# EAGLE board BusPirate-Panel-v3.6a (EAGLE 7.5.0), part 1 of 4
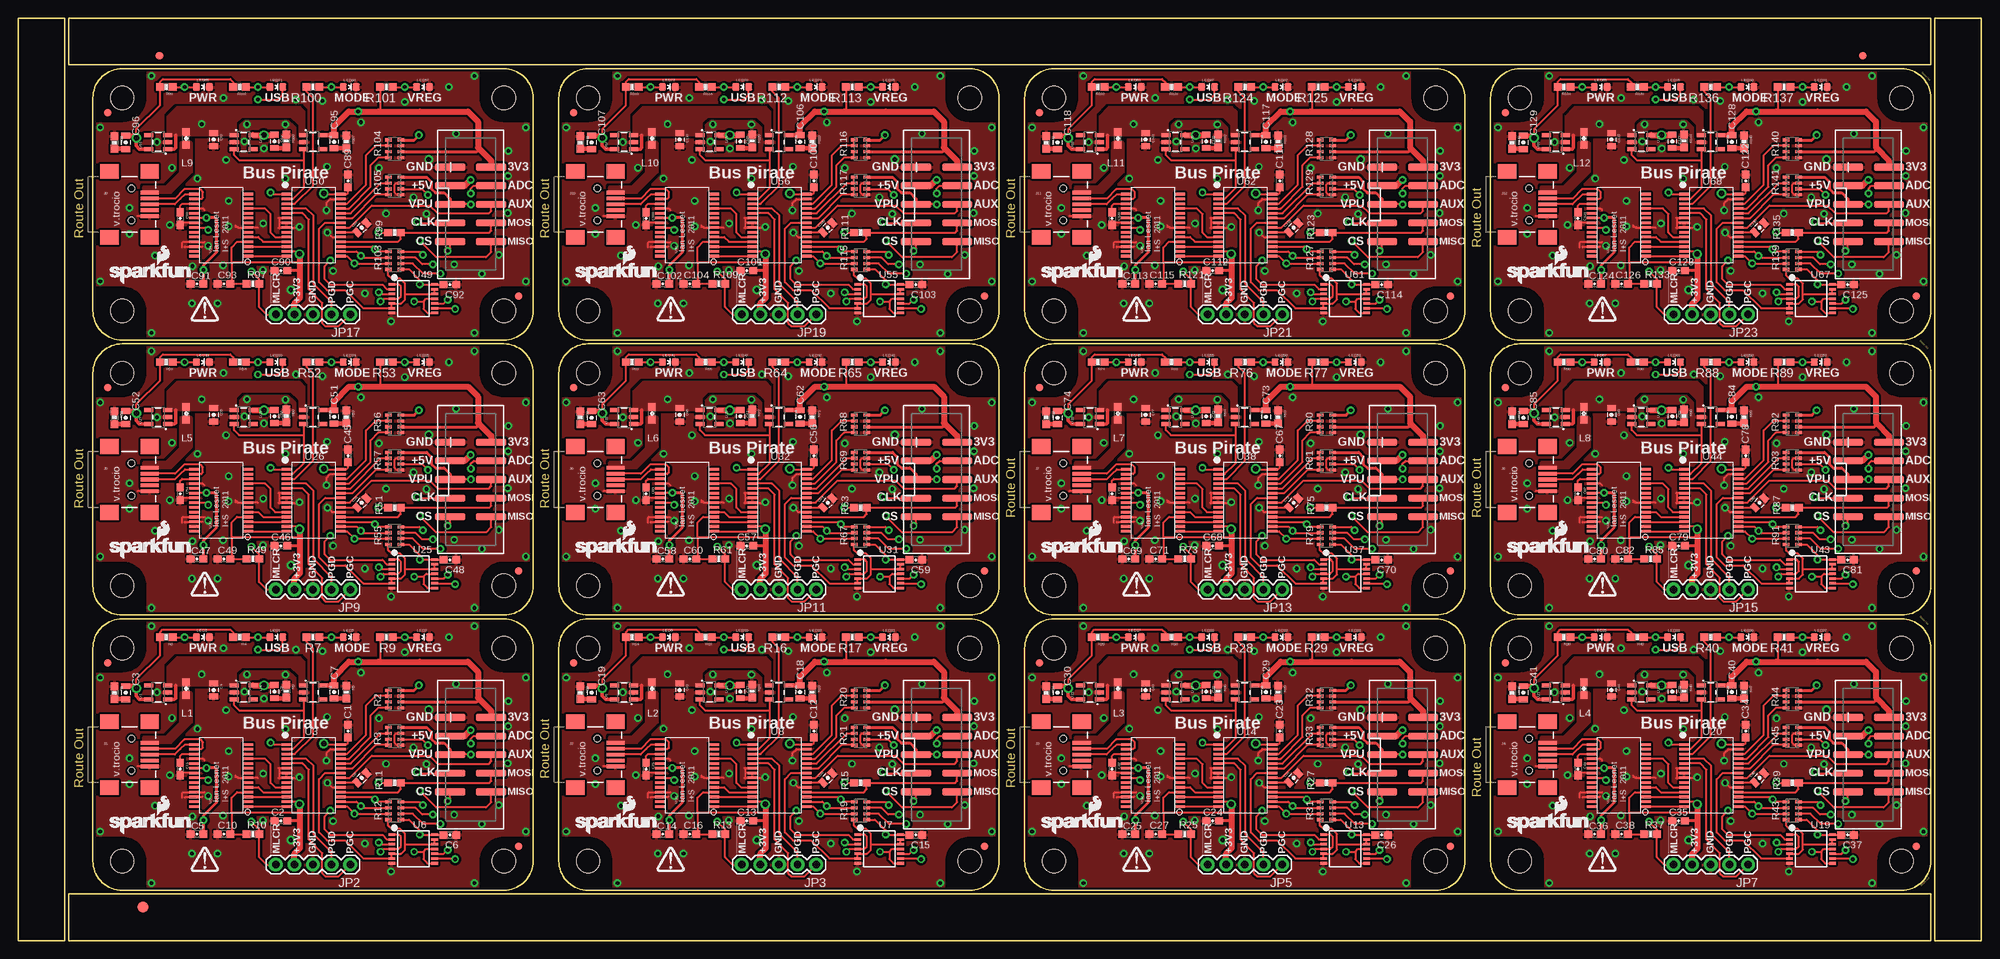
[diagram p0: board, top side]
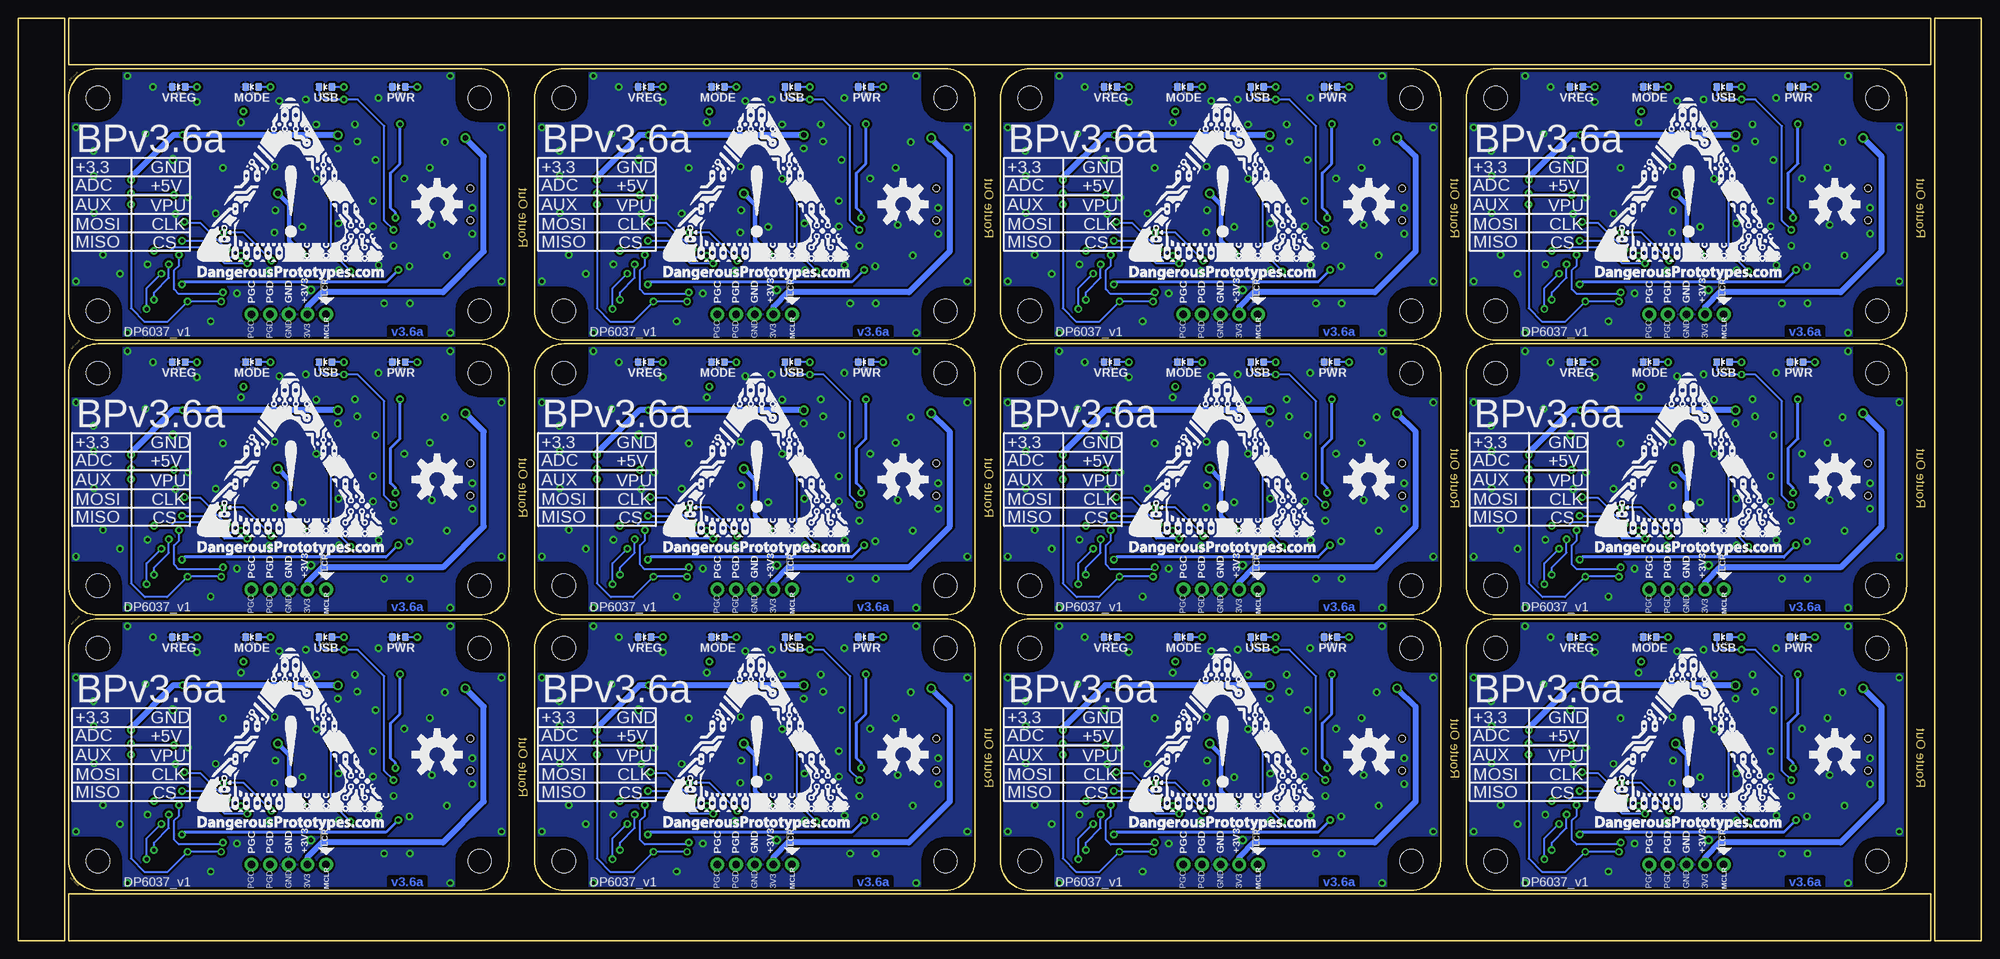
[diagram p1: board, bottom side, seen from below]

Size 267.52 x 125.73 mm. Coordinates in mm from the lower left corner, seen from the top.
Outline: 6.35,79.25 6.35,0 0,0 0,29.72
Outline: 0,27.18 0,125.73 6.35,125.73 6.35,76.71
Outline: 82.55,0 6.86,0 6.86,6.35 33.02,6.35
Outline: 30.48,6.35 260.66,6.35 260.66,0 80.01,0
Outline: 161.55,125.73 260.66,125.73 260.66,119.38 211.08,119.38
Outline: 213.62,119.38 6.86,119.38 6.86,125.73 164.09,125.73
Outline: 267.52,80.52 267.52,0 261.17,0 261.17,30.99
Outline: 261.17,28.45 261.17,125.73 267.52,125.73 267.52,77.98
Copper layers (1*16): Top 0.035mm / dielectric 1.5mm / Bottom 0.035mm
Design rules "SparkFun-2-layer *": minimum track width 7mil, minimum drill 15mil, track to track 8mil, track to pad 8mil, pad to pad 8mil, via to via 8mil, smd to smd 8mil, copper to edge 8mil, drill to drill 8mil, minimum pad ring 12mil, minimum via ring 10mil, stop-mask expansion 4mil, vias tented up to drill 30mil, thermal gap 10mil
tKeepout: 96 lines
bKeepout: 96 lines
tRestrict: area 10.2,36.9 to 17.2,43.9; area 63.2,36.9 to 70.2,43.9; area 10.2,6.9 to 17.2,13.9; area 63.2,6.9 to 70.2,13.9; area 36.3,23.1 to 36.9,23.3; area 23.7,19.8 to 24.2,20; area 73.7,36.9 to 80.7,43.9; area 126.7,36.9 to 133.7,43.9; area 73.7,6.9 to 80.7,13.9; area 126.7,6.9 to 133.7,13.9; area 99.8,23.1 to 100.4,23.3; area 87.2,19.8 to 87.7,20; 60 more areas
bRestrict: area 10.2,36.9 to 17.2,43.9; area 63.2,36.9 to 70.2,43.9; area 10.2,6.9 to 17.2,13.9; area 63.2,6.9 to 70.2,13.9; area 73.7,36.9 to 80.7,43.9; area 126.7,36.9 to 133.7,43.9; area 73.7,6.9 to 80.7,13.9; area 126.7,6.9 to 133.7,13.9; area 137.2,36.9 to 144.2,43.9; area 190.2,36.9 to 197.2,43.9; area 137.2,6.9 to 144.2,13.9; area 190.2,6.9 to 197.2,13.9; 36 more areas
vRestrict: area 10.2,36.9 to 17.2,43.9; area 63.2,36.9 to 70.2,43.9; area 10.2,6.9 to 17.2,13.9; area 63.2,6.9 to 70.2,13.9; area 73.7,36.9 to 80.7,43.9; area 126.7,36.9 to 133.7,43.9; area 73.7,6.9 to 80.7,13.9; area 126.7,6.9 to 133.7,13.9; area 137.2,36.9 to 144.2,43.9; area 190.2,36.9 to 197.2,43.9; area 137.2,6.9 to 144.2,13.9; area 190.2,6.9 to 197.2,13.9; 36 more areas

## Footprints (pad centres in the part's own frame; a part is rotated, then mirrored left to right if it is on the bottom)
0603-CAP = smd 1.1 x 1: 1 -0.85,0; 2 0.85,0
0805-CAP = smd 0.8 x 1.2: 1 -0.9,0; 2 0.9,0
FIDUCIAL-1.5X3 = smd 1.5 x 1.5: 1 0,0
FIDUCIAL-1X2 = smd 1 x 1: 1 0,0
USB-MINIB = smd 2.5 x 0.5: D+ 2.5,0; D- 2.5,0.8; GND 2.5,-1.6; ID 2.5,-0.8; VBUS 2.5,1.6 | smd 2.5 x 2: MTN1 -3,4.5; MTN2 2.5,4.5; MTN3 -3,-4.5; MTN4 2.5,-4.5 | hole 0.9: 0,2.2; 0,-2.2
2X5-SHROUDED_SMD = smd 4.15 x 1: 1 -2.794,5.08; 2 2.794,5.08; 3 -2.794,2.54; 4 2.794,2.54; 5 -2.794,0; 6 2.794,0; 7 -2.794,-2.54; 8 2.794,-2.54; 9 -2.794,-5.08; 10 2.794,-5.08
1X05 = drill 1.016 pad 1.88: 1 0,0; 2 2.54,0; 3 5.08,0; 4 7.62,0; 5 10.16,0
0603 = smd 1.1 x 1: 1 -0.85,0; 2 0.85,0
LED-0603 = smd 1 x 1: A 0,-0.877; C 0,0.877
DP6037_V1 = hole 3.2: 4,4; 56,4; 56,33; 4,33
4XARRAY = smd 0.425 x 0.9: 1 -1.2,-0.85; 2 -0.4,-0.85; 3 0.4,-0.85; 4 1.2,-0.85; 5 1.2,0.85; 6 0.4,0.85; 7 -0.4,0.85; 8 -1.2,0.85
0603-RES = smd 1.1 x 1: 1 -0.85,0; 2 0.85,0
SOT23-5 = smd 0.55 x 1.2: 1 -0.95,-1.3; 2 0,-1.3; 3 0.95,-1.3; 4 0.95,1.3; 5 -0.95,1.3
SSOP28 = smd 0.348 x 1.397: 1 -4.225,-3.656; 2 -3.575,-3.656; 3 -2.925,-3.656; 4 -2.275,-3.656; 5 -1.625,-3.656; 6 -0.975,-3.656; 7 -0.325,-3.656; 8 0.325,-3.656; 9 0.975,-3.656; 10 1.625,-3.656; 11 2.275,-3.656; 12 2.925,-3.656; 13 3.575,-3.656; 14 4.225,-3.656; 15 4.225,3.656; 16 3.575,3.656; 17 2.925,3.656; 18 2.275,3.656; 19 1.625,3.656; 20 0.975,3.656; 21 0.325,3.656; 22 -0.325,3.656; 23 -0.975,3.656; 24 -1.625,3.656; 25 -2.275,3.656; 26 -2.925,3.656; 27 -3.575,3.656; 28 -4.225,3.656
SSOP28DB = smd 0.348 x 1.397: 1 -4.225,-3.656; 2 -3.575,-3.656; 3 -2.925,-3.656; 4 -2.275,-3.656; 5 -1.625,-3.656; 6 -0.975,-3.656; 7 -0.325,-3.656; 8 0.325,-3.656; 9 0.975,-3.656; 10 1.625,-3.656; 11 2.275,-3.656; 12 2.925,-3.656; 13 3.575,-3.656; 14 4.225,-3.656; 15 4.225,3.656; 16 3.575,3.656; 17 2.925,3.656; 18 2.275,3.656; 19 1.625,3.656; 20 0.975,3.656; 21 0.325,3.656; 22 -0.325,3.656; 23 -0.975,3.656; 24 -1.625,3.656; 25 -2.275,3.656; 26 -2.925,3.656; 27 -3.575,3.656; 28 -4.225,3.656
TSSOP14 = smd 0.35 x 0.9: 1 -1.95,-2.925; 2 -1.3,-2.925; 3 -0.65,-2.925; 4 0,-2.925; 5 0.65,-2.925; 6 1.3,-2.925; 7 1.95,-2.925; 8 1.95,2.925; 9 1.3,2.925; 10 0.65,2.925; 11 0,2.925; 12 -0.65,2.925; 13 -1.3,2.925; 14 -1.95,2.925

## Placement (x,y rotation side)
C1  0.1uF  [0603-CAP]  44.93,28.56 90 top
C2  0.1uF  [0603-CAP]  35.78,16.32 180 top
C3  10uF  [0805-CAP]  14.63,33.79 270 top
C4  10uF  [0805-CAP]  26.64,34.18 270 top
C5  0.1uF  [0603-CAP]  24.35,14.52 180 top
C6  0.1uF  [0603-CAP]  58.81,14.41 0 top
C7  10uF  [0805-CAP]  43.02,33.9 270 top
C8  10uF  [0805-CAP]  34.9,33.95 270 top
C9  10uF  [0805-CAP]  46.81,22.17 45 top
C10  0.1uF  [0603-CAP]  28.04,14.52 180 top
C11  0.1uF  [0603-CAP]  22.07,23.41 270 top
C12  0.1uF  [0603-CAP]  108.43,28.56 90 top
C13  0.1uF  [0603-CAP]  99.28,16.32 180 top
C14  0.1uF  [0603-CAP]  87.85,14.52 180 top
C15  0.1uF  [0603-CAP]  122.31,14.41 0 top
C16  0.1uF  [0603-CAP]  91.54,14.52 180 top
C17  10uF  [0805-CAP]  98.4,33.95 270 top
C18  10uF  [0805-CAP]  106.52,33.9 270 top
C19  10uF  [0805-CAP]  78.13,33.79 270 top
C20  10uF  [0805-CAP]  110.31,22.17 45 top
C21  0.1uF  [0603-CAP]  85.57,23.41 270 top
C22  10uF  [0805-CAP]  90.14,34.18 270 top
C23  0.1uF  [0603-CAP]  171.93,28.56 90 top
C24  0.1uF  [0603-CAP]  162.78,16.32 180 top
C25  0.1uF  [0603-CAP]  151.35,14.52 180 top
C26  0.1uF  [0603-CAP]  185.81,14.41 0 top
C27  0.1uF  [0603-CAP]  155.04,14.52 180 top
C28  10uF  [0805-CAP]  161.9,33.95 270 top
C29  10uF  [0805-CAP]  170.02,33.9 270 top
C30  10uF  [0805-CAP]  141.63,33.79 270 top
C31  10uF  [0805-CAP]  173.81,22.17 45 top
C32  0.1uF  [0603-CAP]  149.07,23.41 270 top
C33  10uF  [0805-CAP]  153.64,34.18 270 top
C34  0.1uF  [0603-CAP]  235.43,28.56 90 top
C35  0.1uF  [0603-CAP]  226.28,16.32 180 top
C36  0.1uF  [0603-CAP]  214.85,14.52 180 top
C37  0.1uF  [0603-CAP]  249.31,14.41 0 top
C38  0.1uF  [0603-CAP]  218.54,14.52 180 top
C39  10uF  [0805-CAP]  225.4,33.95 270 top
C40  10uF  [0805-CAP]  233.52,33.9 270 top
C41  10uF  [0805-CAP]  205.13,33.79 270 top
C42  10uF  [0805-CAP]  237.31,22.17 45 top
C43  0.1uF  [0603-CAP]  212.57,23.41 270 top
C44  10uF  [0805-CAP]  217.14,34.18 270 top
C45  0.1uF  [0603-CAP]  44.93,66.07 90 top
C46  0.1uF  [0603-CAP]  35.78,53.83 180 top
C47  0.1uF  [0603-CAP]  24.35,52.03 180 top
C48  0.1uF  [0603-CAP]  58.81,51.91 0 top
C49  0.1uF  [0603-CAP]  28.04,52.03 180 top
C50  10uF  [0805-CAP]  34.9,71.46 270 top
C51  10uF  [0805-CAP]  43.02,71.4 270 top
C52  10uF  [0805-CAP]  14.63,71.3 270 top
C53  10uF  [0805-CAP]  46.81,59.68 45 top
C54  0.1uF  [0603-CAP]  22.07,60.92 270 top
C55  10uF  [0805-CAP]  26.64,71.68 270 top
C56  0.1uF  [0603-CAP]  108.43,66.07 90 top
C57  0.1uF  [0603-CAP]  99.28,53.83 180 top
C58  0.1uF  [0603-CAP]  87.85,52.03 180 top
C59  0.1uF  [0603-CAP]  122.31,51.91 0 top
C60  0.1uF  [0603-CAP]  91.54,52.03 180 top
C61  10uF  [0805-CAP]  98.4,71.46 270 top
C62  10uF  [0805-CAP]  106.52,71.4 270 top
C63  10uF  [0805-CAP]  78.13,71.3 270 top
C64  10uF  [0805-CAP]  110.31,59.68 45 top
C65  0.1uF  [0603-CAP]  85.57,60.92 270 top
C66  10uF  [0805-CAP]  90.14,71.68 270 top
C67  0.1uF  [0603-CAP]  171.93,66.07 90 top
C68  0.1uF  [0603-CAP]  162.78,53.83 180 top
C69  0.1uF  [0603-CAP]  151.35,52.03 180 top
C70  0.1uF  [0603-CAP]  185.81,51.91 0 top
C71  0.1uF  [0603-CAP]  155.04,52.03 180 top
C72  10uF  [0805-CAP]  161.9,71.46 270 top
C73  10uF  [0805-CAP]  170.02,71.4 270 top
C74  10uF  [0805-CAP]  141.63,71.3 270 top
C75  10uF  [0805-CAP]  173.81,59.68 45 top
C76  0.1uF  [0603-CAP]  149.07,60.92 270 top
C77  10uF  [0805-CAP]  153.64,71.68 270 top
C78  0.1uF  [0603-CAP]  235.43,66.07 90 top
C79  0.1uF  [0603-CAP]  226.28,53.83 180 top
C80  0.1uF  [0603-CAP]  214.85,52.03 180 top
C81  0.1uF  [0603-CAP]  249.31,51.91 0 top
C82  0.1uF  [0603-CAP]  218.54,52.03 180 top
C83  10uF  [0805-CAP]  225.4,71.46 270 top
C84  10uF  [0805-CAP]  233.52,71.4 270 top
C85  10uF  [0805-CAP]  205.13,71.3 270 top
C86  10uF  [0805-CAP]  237.31,59.68 45 top
C87  0.1uF  [0603-CAP]  212.57,60.92 270 top
C88  10uF  [0805-CAP]  217.14,71.68 270 top
C89  0.1uF  [0603-CAP]  44.93,103.58 90 top
C90  0.1uF  [0603-CAP]  35.78,91.34 180 top
C91  0.1uF  [0603-CAP]  24.35,89.54 180 top
C92  0.1uF  [0603-CAP]  58.81,89.42 0 top
C93  0.1uF  [0603-CAP]  28.04,89.54 180 top
C94  10uF  [0805-CAP]  34.9,108.96 270 top
C95  10uF  [0805-CAP]  43.02,108.91 270 top
C96  10uF  [0805-CAP]  14.63,108.81 270 top
C97  10uF  [0805-CAP]  46.81,97.19 45 top
C98  0.1uF  [0603-CAP]  22.07,98.43 270 top
C99  10uF  [0805-CAP]  26.64,109.19 270 top
C100  0.1uF  [0603-CAP]  108.43,103.58 90 top
C101  0.1uF  [0603-CAP]  99.28,91.34 180 top
C102  0.1uF  [0603-CAP]  87.85,89.54 180 top
C103  0.1uF  [0603-CAP]  122.31,89.42 0 top
C104  0.1uF  [0603-CAP]  91.54,89.54 180 top
C105  10uF  [0805-CAP]  98.4,108.96 270 top
C106  10uF  [0805-CAP]  106.52,108.91 270 top
C107  10uF  [0805-CAP]  78.13,108.81 270 top
C108  10uF  [0805-CAP]  110.31,97.19 45 top
C109  0.1uF  [0603-CAP]  85.57,98.43 270 top
C110  10uF  [0805-CAP]  90.14,109.19 270 top
C111  0.1uF  [0603-CAP]  171.93,103.58 90 top
C112  0.1uF  [0603-CAP]  162.78,91.34 180 top
C113  0.1uF  [0603-CAP]  151.35,89.54 180 top
C114  0.1uF  [0603-CAP]  185.81,89.42 0 top
C115  0.1uF  [0603-CAP]  155.04,89.54 180 top
C116  10uF  [0805-CAP]  161.9,108.96 270 top
C117  10uF  [0805-CAP]  170.02,108.91 270 top
C118  10uF  [0805-CAP]  141.63,108.81 270 top
C119  10uF  [0805-CAP]  173.81,97.19 45 top
C120  0.1uF  [0603-CAP]  149.07,98.43 270 top
C121  10uF  [0805-CAP]  153.64,109.19 270 top
C122  0.1uF  [0603-CAP]  235.43,103.58 90 top
C123  0.1uF  [0603-CAP]  226.28,91.34 180 top
C124  0.1uF  [0603-CAP]  214.85,89.54 180 top
C125  0.1uF  [0603-CAP]  249.31,89.42 0 top
C126  0.1uF  [0603-CAP]  218.54,89.54 180 top
C127  10uF  [0805-CAP]  225.4,108.96 270 top
C128  10uF  [0805-CAP]  233.52,108.91 270 top
C129  10uF  [0805-CAP]  205.13,108.81 270 top
C130  10uF  [0805-CAP]  237.31,97.19 45 top
C131  0.1uF  [0603-CAP]  212.57,98.43 270 top
C132  10uF  [0805-CAP]  217.14,109.19 270 top
E$1  [FIDUCIAL-1.5X3]  17.02,4.57 0 top
E$7  [FIDUCIAL-1X2]  19.23,120.65 0 top
E$8  [FIDUCIAL-1X2]  251.39,120.65 180 top
FID1  FIDUCIAL1X2  [FIDUCIAL-1X2]  12.16,37.86 0 top
FID2  FIDUCIAL1X2  [FIDUCIAL-1X2]  68.16,12.86 0 top
FID3  FIDUCIAL1X2  [FIDUCIAL-1X2]  75.66,37.86 0 top
FID4  FIDUCIAL1X2  [FIDUCIAL-1X2]  131.66,12.86 0 top
FID5  FIDUCIAL1X2  [FIDUCIAL-1X2]  139.16,37.86 0 top
FID6  FIDUCIAL1X2  [FIDUCIAL-1X2]  195.16,12.86 0 top
FID7  FIDUCIAL1X2  [FIDUCIAL-1X2]  202.66,37.86 0 top
FID8  FIDUCIAL1X2  [FIDUCIAL-1X2]  258.66,12.86 0 top
FID9  FIDUCIAL1X2  [FIDUCIAL-1X2]  12.16,75.37 0 top
FID10  FIDUCIAL1X2  [FIDUCIAL-1X2]  68.16,50.37 0 top
FID11  FIDUCIAL1X2  [FIDUCIAL-1X2]  75.66,75.37 0 top
FID12  FIDUCIAL1X2  [FIDUCIAL-1X2]  131.66,50.37 0 top
FID13  FIDUCIAL1X2  [FIDUCIAL-1X2]  139.16,75.37 0 top
FID14  FIDUCIAL1X2  [FIDUCIAL-1X2]  195.16,50.37 0 top
FID15  FIDUCIAL1X2  [FIDUCIAL-1X2]  202.66,75.37 0 top
FID16  FIDUCIAL1X2  [FIDUCIAL-1X2]  258.66,50.37 0 top
FID17  FIDUCIAL1X2  [FIDUCIAL-1X2]  12.16,112.87 0 top
FID18  FIDUCIAL1X2  [FIDUCIAL-1X2]  68.16,87.87 0 top
FID19  FIDUCIAL1X2  [FIDUCIAL-1X2]  75.66,112.87 0 top
FID20  FIDUCIAL1X2  [FIDUCIAL-1X2]  131.66,87.87 0 top
FID21  FIDUCIAL1X2  [FIDUCIAL-1X2]  139.16,112.87 0 top
FID22  FIDUCIAL1X2  [FIDUCIAL-1X2]  195.16,87.87 0 top
FID23  FIDUCIAL1X2  [FIDUCIAL-1X2]  202.66,112.87 0 top
FID24  FIDUCIAL1X2  [FIDUCIAL-1X2]  258.66,87.87 0 top
J1  USB-MINIB-5PIN  [USB-MINIB]  15.41,25.36 0 top
J2  USB-MINIB-5PIN  [USB-MINIB]  78.91,25.36 0 top
J3  USB-MINIB-5PIN  [USB-MINIB]  142.41,25.36 0 top
J4  USB-MINIB-5PIN  [USB-MINIB]  205.91,25.36 0 top
J5  USB-MINIB-5PIN  [USB-MINIB]  15.41,62.87 0 top
J6  USB-MINIB-5PIN  [USB-MINIB]  78.91,62.87 0 top
J7  USB-MINIB-5PIN  [USB-MINIB]  142.41,62.87 0 top
J8  USB-MINIB-5PIN  [USB-MINIB]  205.91,62.87 0 top
J9  USB-MINIB-5PIN  [USB-MINIB]  15.41,100.37 0 top
J10  USB-MINIB-5PIN  [USB-MINIB]  78.91,100.37 0 top
J11  USB-MINIB-5PIN  [USB-MINIB]  142.41,100.37 0 top
J12  USB-MINIB-5PIN  [USB-MINIB]  205.91,100.37 0 top
JP1  [2X5-SHROUDED_SMD]  61.66,25.36 0 top
JP2  [1X05]  45.24,10.36 180 top
JP3  [1X05]  108.74,10.36 180 top
JP4  [2X5-SHROUDED_SMD]  125.16,25.36 0 top
JP5  [1X05]  172.24,10.36 180 top
JP6  [2X5-SHROUDED_SMD]  188.66,25.36 0 top
JP7  [1X05]  235.74,10.36 180 top
JP8  [2X5-SHROUDED_SMD]  252.16,25.36 0 top
JP9  [1X05]  45.24,47.87 180 top
JP10  [2X5-SHROUDED_SMD]  61.66,62.87 0 top
JP11  [1X05]  108.74,47.87 180 top
JP12  [2X5-SHROUDED_SMD]  125.16,62.87 0 top
JP13  [1X05]  172.24,47.87 180 top
JP14  [2X5-SHROUDED_SMD]  188.66,62.87 0 top
JP15  [1X05]  235.74,47.87 180 top
JP16  [2X5-SHROUDED_SMD]  252.16,62.87 0 top
JP17  [1X05]  45.24,85.37 180 top
JP18  [2X5-SHROUDED_SMD]  61.66,100.37 0 top
JP19  [1X05]  108.74,85.37 180 top
JP20  [2X5-SHROUDED_SMD]  125.16,100.37 0 top
JP21  [1X05]  172.24,85.37 180 top
JP22  [2X5-SHROUDED_SMD]  188.66,100.37 0 top
JP23  [1X05]  235.74,85.37 180 top
JP24  [2X5-SHROUDED_SMD]  252.16,100.37 0 top
L1  1A Ferrite  [0603]  22.86,34.35 90 top
L2  1A Ferrite  [0603]  86.36,34.35 90 top
L3  1A Ferrite  [0603]  149.86,34.35 90 top
L4  1A Ferrite  [0603]  213.36,34.35 90 top
L5  1A Ferrite  [0603]  22.86,71.86 90 top
L6  1A Ferrite  [0603]  86.36,71.86 90 top
L7  1A Ferrite  [0603]  149.86,71.86 90 top
L8  1A Ferrite  [0603]  213.36,71.86 90 top
L9  1A Ferrite  [0603]  22.86,109.37 90 top
L10  1A Ferrite  [0603]  86.36,109.37 90 top
L11  1A Ferrite  [0603]  149.86,109.37 90 top
L12  1A Ferrite  [0603]  213.36,109.37 90 top
LED1  RED  [LED-0603]  35.16,41.36 270 top
LED2  DNP  [LED-0603]  35.16,41.36 90 bottom
LED3  RED  [LED-0603]  25.16,41.36 270 top
LED4  DNP  [LED-0603]  25.16,41.36 90 bottom
LED5  RED  [LED-0603]  45.16,41.36 270 top
LED6  DNP  [LED-0603]  45.16,41.36 90 bottom
LED7  RED  [LED-0603]  55.16,41.36 270 top
LED8  DNP  [LED-0603]  55.16,41.36 90 bottom
LED9  RED  [LED-0603]  88.66,41.36 270 top
LED10  RED  [LED-0603]  108.66,41.36 270 top
LED11  RED  [LED-0603]  118.66,41.36 270 top
LED12  DNP  [LED-0603]  118.66,41.36 90 bottom
LED13  DNP  [LED-0603]  108.66,41.36 90 bottom
LED14  DNP  [LED-0603]  88.66,41.36 90 bottom
LED15  RED  [LED-0603]  98.66,41.36 270 top
LED16  DNP  [LED-0603]  98.66,41.36 90 bottom
LED17  RED  [LED-0603]  152.16,41.36 270 top
LED18  RED  [LED-0603]  172.16,41.36 270 top
LED19  RED  [LED-0603]  182.16,41.36 270 top
LED20  DNP  [LED-0603]  182.16,41.36 90 bottom
LED21  DNP  [LED-0603]  172.16,41.36 90 bottom
LED22  DNP  [LED-0603]  152.16,41.36 90 bottom
LED23  RED  [LED-0603]  162.16,41.36 270 top
LED24  DNP  [LED-0603]  162.16,41.36 90 bottom
LED25  RED  [LED-0603]  215.66,41.36 270 top
LED26  RED  [LED-0603]  235.66,41.36 270 top
LED27  RED  [LED-0603]  245.66,41.36 270 top
LED28  DNP  [LED-0603]  245.66,41.36 90 bottom
LED29  DNP  [LED-0603]  235.66,41.36 90 bottom
LED30  DNP  [LED-0603]  215.66,41.36 90 bottom
LED31  RED  [LED-0603]  225.66,41.36 270 top
LED32  DNP  [LED-0603]  225.66,41.36 90 bottom
LED33  RED  [LED-0603]  25.16,78.87 270 top
LED34  RED  [LED-0603]  45.16,78.87 270 top
LED35  RED  [LED-0603]  55.16,78.87 270 top
LED36  DNP  [LED-0603]  55.16,78.87 90 bottom
LED37  DNP  [LED-0603]  45.16,78.87 90 bottom
LED38  DNP  [LED-0603]  25.16,78.87 90 bottom
LED39  RED  [LED-0603]  35.16,78.87 270 top
LED40  DNP  [LED-0603]  35.16,78.87 90 bottom
LED41  RED  [LED-0603]  88.66,78.87 270 top
LED42  RED  [LED-0603]  108.66,78.87 270 top
LED43  RED  [LED-0603]  118.66,78.87 270 top
LED44  DNP  [LED-0603]  118.66,78.87 90 bottom
LED45  DNP  [LED-0603]  108.66,78.87 90 bottom
LED46  DNP  [LED-0603]  88.66,78.87 90 bottom
LED47  RED  [LED-0603]  98.66,78.87 270 top
LED48  DNP  [LED-0603]  98.66,78.87 90 bottom
LED49  RED  [LED-0603]  152.16,78.87 270 top
LED50  RED  [LED-0603]  172.16,78.87 270 top
LED51  RED  [LED-0603]  182.16,78.87 270 top
LED52  DNP  [LED-0603]  182.16,78.87 90 bottom
LED53  DNP  [LED-0603]  172.16,78.87 90 bottom
LED54  DNP  [LED-0603]  152.16,78.87 90 bottom
LED55  RED  [LED-0603]  162.16,78.87 270 top
LED56  DNP  [LED-0603]  162.16,78.87 90 bottom
LED57  RED  [LED-0603]  215.66,78.87 270 top
LED58  RED  [LED-0603]  235.66,78.87 270 top
LED59  RED  [LED-0603]  245.66,78.87 270 top
LED60  DNP  [LED-0603]  245.66,78.87 90 bottom
LED61  DNP  [LED-0603]  235.66,78.87 90 bottom
LED62  DNP  [LED-0603]  215.66,78.87 90 bottom
LED63  RED  [LED-0603]  225.66,78.87 270 top
LED64  DNP  [LED-0603]  225.66,78.87 90 bottom
LED65  RED  [LED-0603]  25.16,116.37 270 top
LED66  RED  [LED-0603]  45.16,116.37 270 top
LED67  RED  [LED-0603]  55.16,116.37 270 top
LED68  DNP  [LED-0603]  55.16,116.37 90 bottom
LED69  DNP  [LED-0603]  45.16,116.37 90 bottom
LED70  DNP  [LED-0603]  25.16,116.37 90 bottom
LED71  RED  [LED-0603]  35.16,116.37 270 top
LED72  DNP  [LED-0603]  35.16,116.37 90 bottom
LED73  RED  [LED-0603]  88.66,116.37 270 top
LED74  RED  [LED-0603]  108.66,116.37 270 top
LED75  RED  [LED-0603]  118.66,116.37 270 top
LED76  DNP  [LED-0603]  118.66,116.37 90 bottom
LED77  DNP  [LED-0603]  108.66,116.37 90 bottom
LED78  DNP  [LED-0603]  88.66,116.37 90 bottom
LED79  RED  [LED-0603]  98.66,116.37 270 top
LED80  DNP  [LED-0603]  98.66,116.37 90 bottom
LED81  RED  [LED-0603]  152.16,116.37 270 top
LED82  RED  [LED-0603]  172.16,116.37 270 top
LED83  RED  [LED-0603]  182.16,116.37 270 top
LED84  DNP  [LED-0603]  182.16,116.37 90 bottom
LED85  DNP  [LED-0603]  172.16,116.37 90 bottom
LED86  DNP  [LED-0603]  152.16,116.37 90 bottom
LED87  RED  [LED-0603]  162.16,116.37 270 top
LED88  DNP  [LED-0603]  162.16,116.37 90 bottom
LED89  RED  [LED-0603]  215.66,116.37 270 top
LED90  RED  [LED-0603]  235.66,116.37 270 top
LED91  RED  [LED-0603]  245.66,116.37 270 top
LED92  DNP  [LED-0603]  245.66,116.37 90 bottom
LED93  DNP  [LED-0603]  235.66,116.37 90 bottom
LED94  DNP  [LED-0603]  215.66,116.37 90 bottom
LED95  RED  [LED-0603]  225.66,116.37 270 top
LED96  DNP  [LED-0603]  225.66,116.37 90 bottom
LOGO1  OSHW-LOGOL  [OSHW-LOGO-L]  19.94,25.36 0 bottom
LOGO2  SFE_LOGO_NAME_FLAME.1_INCH  [SFE_LOGO_NAME_FLAME_.1]  12.06,14.48 0 top
LOGO3  SFE_LOGO_NAME_FLAME.1_INCH  [SFE_LOGO_NAME_FLAME_.1]  75.56,14.48 0 top
LOGO4  OSHW-LOGOL  [OSHW-LOGO-L]  83.44,25.36 0 bottom
LOGO5  SFE_LOGO_NAME_FLAME.1_INCH  [SFE_LOGO_NAME_FLAME_.1]  139.06,14.48 0 top
LOGO6  OSHW-LOGOL  [OSHW-LOGO-L]  146.94,25.36 0 bottom
LOGO7  SFE_LOGO_NAME_FLAME.1_INCH  [SFE_LOGO_NAME_FLAME_.1]  202.56,14.48 0 top
LOGO8  OSHW-LOGOL  [OSHW-LOGO-L]  210.44,25.36 0 bottom
LOGO9  SFE_LOGO_NAME_FLAME.1_INCH  [SFE_LOGO_NAME_FLAME_.1]  12.06,51.99 0 top
LOGO10  OSHW-LOGOL  [OSHW-LOGO-L]  19.94,62.87 0 bottom
LOGO11  SFE_LOGO_NAME_FLAME.1_INCH  [SFE_LOGO_NAME_FLAME_.1]  75.56,51.99 0 top
LOGO12  OSHW-LOGOL  [OSHW-LOGO-L]  83.44,62.87 0 bottom
LOGO13  SFE_LOGO_NAME_FLAME.1_INCH  [SFE_LOGO_NAME_FLAME_.1]  139.06,51.99 0 top
LOGO14  OSHW-LOGOL  [OSHW-LOGO-L]  146.94,62.87 0 bottom
LOGO15  SFE_LOGO_NAME_FLAME.1_INCH  [SFE_LOGO_NAME_FLAME_.1]  202.56,51.99 0 top
LOGO16  OSHW-LOGOL  [OSHW-LOGO-L]  210.44,62.87 0 bottom
LOGO17  SFE_LOGO_NAME_FLAME.1_INCH  [SFE_LOGO_NAME_FLAME_.1]  12.06,89.49 0 top
LOGO18  OSHW-LOGOL  [OSHW-LOGO-L]  19.94,100.37 0 bottom
LOGO19  SFE_LOGO_NAME_FLAME.1_INCH  [SFE_LOGO_NAME_FLAME_.1]  75.56,89.49 0 top
LOGO20  OSHW-LOGOL  [OSHW-LOGO-L]  83.44,100.37 0 bottom
LOGO21  SFE_LOGO_NAME_FLAME.1_INCH  [SFE_LOGO_NAME_FLAME_.1]  139.06,89.49 0 top
LOGO22  OSHW-LOGOL  [OSHW-LOGO-L]  146.94,100.37 0 bottom
LOGO23  SFE_LOGO_NAME_FLAME.1_INCH  [SFE_LOGO_NAME_FLAME_.1]  202.56,89.49 0 top
LOGO24  OSHW-LOGOL  [OSHW-LOGO-L]  210.44,100.37 0 bottom
PCB1  PCB_DP_RECTANGLE-37X60  [DP6037_V1]  10.16,6.86 0 top
PCB2  PCB_DP_RECTANGLE-37X60  [DP6037_V1]  73.66,6.86 0 top
PCB3  PCB_DP_RECTANGLE-37X60  [DP6037_V1]  137.16,6.86 0 top
PCB4  PCB_DP_RECTANGLE-37X60  [DP6037_V1]  200.66,6.86 0 top
PCB5  PCB_DP_RECTANGLE-37X60  [DP6037_V1]  10.16,44.37 0 top
PCB6  PCB_DP_RECTANGLE-37X60  [DP6037_V1]  73.66,44.37 0 top
PCB7  PCB_DP_RECTANGLE-37X60  [DP6037_V1]  137.16,44.37 0 top
PCB8  PCB_DP_RECTANGLE-37X60  [DP6037_V1]  200.66,44.37 0 top
PCB9  PCB_DP_RECTANGLE-37X60  [DP6037_V1]  10.16,81.87 0 top
PCB10  PCB_DP_RECTANGLE-37X60  [DP6037_V1]  73.66,81.87 0 top
PCB11  PCB_DP_RECTANGLE-37X60  [DP6037_V1]  137.16,81.87 0 top
PCB12  PCB_DP_RECTANGLE-37X60  [DP6037_V1]  200.66,81.87 0 top
R1  0  [0603]  13.11,33.78 270 top
R2  10k  [4XARRAY]  51.28,32.94 270 top
R3  10k  [4XARRAY]  51.28,27.86 270 top
R4  1K  [0603-RES]  30.16,41.36 180 top
R5  0  [0603]  44.7,33.88 270 top
R6  1K  [0603-RES]  20.16,41.36 180 top
R7  1K  [0603-RES]  40.16,41.36 180 top
R8  0  [0603]  36.53,34.01 270 top
R9  1K  [0603-RES]  50.16,41.36 180 top
R10  2.0k  [0603-RES]  31.97,14.52 180 top
R11  2.0k  [0603-RES]  51.28,21.5 180 top
R12  10k  [4XARRAY]  51.28,17.7 270 top
R13  2.0k  [0603-RES]  95.47,14.52 180 top
R14  1K  [0603-RES]  83.66,41.36 180 top
R15  2.0k  [0603-RES]  114.78,21.5 180 top
R16  1K  [0603-RES]  103.66,41.36 180 top
R17  1K  [0603-RES]  113.66,41.36 180 top
R18  1K  [0603-RES]  93.66,41.36 180 top
R19  10k  [4XARRAY]  114.78,17.7 270 top
R20  10k  [4XARRAY]  114.78,32.94 270 top
R21  10k  [4XARRAY]  114.78,27.86 270 top
R22  0  [0603]  76.61,33.78 270 top
R23  0  [0603]  108.2,33.88 270 top
R24  0  [0603]  100.03,34.01 270 top
R25  2.0k  [0603-RES]  158.97,14.52 180 top
R26  1K  [0603-RES]  147.16,41.36 180 top
R27  2.0k  [0603-RES]  178.28,21.5 180 top
R28  1K  [0603-RES]  167.16,41.36 180 top
R29  1K  [0603-RES]  177.16,41.36 180 top
R30  1K  [0603-RES]  157.16,41.36 180 top
R31  10k  [4XARRAY]  178.28,17.7 270 top
R32  10k  [4XARRAY]  178.28,32.94 270 top
R33  10k  [4XARRAY]  178.28,27.86 270 top
R34  0  [0603]  140.11,33.78 270 top
R35  0  [0603]  171.7,33.88 270 top
R36  0  [0603]  163.53,34.01 270 top
R37  2.0k  [0603-RES]  222.47,14.52 180 top
R38  1K  [0603-RES]  210.66,41.36 180 top
R39  2.0k  [0603-RES]  241.78,21.5 180 top
R40  1K  [0603-RES]  230.66,41.36 180 top
R41  1K  [0603-RES]  240.66,41.36 180 top
R42  1K  [0603-RES]  220.66,41.36 180 top
R43  10k  [4XARRAY]  241.78,17.7 270 top
R44  10k  [4XARRAY]  241.78,32.94 270 top
R45  10k  [4XARRAY]  241.78,27.86 270 top
R46  0  [0603]  203.61,33.78 270 top
R47  0  [0603]  235.2,33.88 270 top
R48  0  [0603]  227.03,34.01 270 top
R49  2.0k  [0603-RES]  31.97,52.03 180 top
R50  1K  [0603-RES]  20.16,78.87 180 top
R51  2.0k  [0603-RES]  51.28,59.01 180 top
R52  1K  [0603-RES]  40.16,78.87 180 top
R53  1K  [0603-RES]  50.16,78.87 180 top
R54  1K  [0603-RES]  30.16,78.87 180 top
R55  10k  [4XARRAY]  51.28,55.2 270 top
R56  10k  [4XARRAY]  51.28,70.44 270 top
R57  10k  [4XARRAY]  51.28,65.36 270 top
R58  0  [0603]  13.11,71.29 270 top
R59  0  [0603]  44.7,71.39 270 top
R60  0  [0603]  36.53,71.52 270 top
R61  2.0k  [0603-RES]  95.47,52.03 180 top
R62  1K  [0603-RES]  83.66,78.87 180 top
R63  2.0k  [0603-RES]  114.78,59.01 180 top
R64  1K  [0603-RES]  103.66,78.87 180 top
R65  1K  [0603-RES]  113.66,78.87 180 top
R66  1K  [0603-RES]  93.66,78.87 180 top
R67  10k  [4XARRAY]  114.78,55.2 270 top
R68  10k  [4XARRAY]  114.78,70.44 270 top
R69  10k  [4XARRAY]  114.78,65.36 270 top
R70  0  [0603]  76.61,71.29 270 top
R71  0  [0603]  108.2,71.39 270 top
R72  0  [0603]  100.03,71.52 270 top
R73  2.0k  [0603-RES]  158.97,52.03 180 top
R74  1K  [0603-RES]  147.16,78.87 180 top
R75  2.0k  [0603-RES]  178.28,59.01 180 top
R76  1K  [0603-RES]  167.16,78.87 180 top
R77  1K  [0603-RES]  177.16,78.87 180 top
R78  1K  [0603-RES]  157.16,78.87 180 top
R79  10k  [4XARRAY]  178.28,55.2 270 top
R80  10k  [4XARRAY]  178.28,70.44 270 top
R81  10k  [4XARRAY]  178.28,65.36 270 top
R82  0  [0603]  140.11,71.29 270 top
R83  0  [0603]  171.7,71.39 270 top
R84  0  [0603]  163.53,71.52 270 top
R85  2.0k  [0603-RES]  222.47,52.03 180 top
R86  1K  [0603-RES]  210.66,78.87 180 top
R87  2.0k  [0603-RES]  241.78,59.01 180 top
R88  1K  [0603-RES]  230.66,78.87 180 top
R89  1K  [0603-RES]  240.66,78.87 180 top
R90  1K  [0603-RES]  220.66,78.87 180 top
R91  10k  [4XARRAY]  241.78,55.2 270 top
R92  10k  [4XARRAY]  241.78,70.44 270 top
R93  10k  [4XARRAY]  241.78,65.36 270 top
R94  0  [0603]  203.61,71.29 270 top
R95  0  [0603]  235.2,71.39 270 top
R96  0  [0603]  227.03,71.52 270 top
R97  2.0k  [0603-RES]  31.97,89.54 180 top
R98  1K  [0603-RES]  20.16,116.37 180 top
R99  2.0k  [0603-RES]  51.28,96.52 180 top
R100  1K  [0603-RES]  40.16,116.37 180 top
R101  1K  [0603-RES]  50.16,116.37 180 top
R102  1K  [0603-RES]  30.16,116.37 180 top
R103  10k  [4XARRAY]  51.28,92.71 270 top
R104  10k  [4XARRAY]  51.28,107.95 270 top
R105  10k  [4XARRAY]  51.28,102.87 270 top
R106  0  [0603]  13.11,108.8 270 top
R107  0  [0603]  44.7,108.9 270 top
R108  0  [0603]  36.53,109.03 270 top
R109  2.0k  [0603-RES]  95.47,89.54 180 top
R110  1K  [0603-RES]  83.66,116.37 180 top
R111  2.0k  [0603-RES]  114.78,96.52 180 top
R112  1K  [0603-RES]  103.66,116.37 180 top
R113  1K  [0603-RES]  113.66,116.37 180 top
R114  1K  [0603-RES]  93.66,116.37 180 top
R115  10k  [4XARRAY]  114.78,92.71 270 top
R116  10k  [4XARRAY]  114.78,107.95 270 top
R117  10k  [4XARRAY]  114.78,102.87 270 top
R118  0  [0603]  76.61,108.8 270 top
R119  0  [0603]  108.2,108.9 270 top
R120  0  [0603]  100.03,109.03 270 top
R121  2.0k  [0603-RES]  158.97,89.54 180 top
R122  1K  [0603-RES]  147.16,116.37 180 top
R123  2.0k  [0603-RES]  178.28,96.52 180 top
R124  1K  [0603-RES]  167.16,116.37 180 top
R125  1K  [0603-RES]  177.16,116.37 180 top
R126  1K  [0603-RES]  157.16,116.37 180 top
R127  10k  [4XARRAY]  178.28,92.71 270 top
R128  10k  [4XARRAY]  178.28,107.95 270 top
R129  10k  [4XARRAY]  178.28,102.87 270 top
R130  0  [0603]  140.11,108.8 270 top
R131  0  [0603]  171.7,108.9 270 top
R132  0  [0603]  163.53,109.03 270 top
R133  2.0k  [0603-RES]  222.47,89.54 180 top
R134  1K  [0603-RES]  210.66,116.37 180 top
R135  2.0k  [0603-RES]  241.78,96.52 180 top
R136  1K  [0603-RES]  230.66,116.37 180 top
R137  1K  [0603-RES]  240.66,116.37 180 top
R138  1K  [0603-RES]  220.66,116.37 180 top
R139  10k  [4XARRAY]  241.78,92.71 270 top
R140  10k  [4XARRAY]  241.78,107.95 270 top
R141  10k  [4XARRAY]  241.78,102.87 270 top
R142  0  [0603]  203.61,108.8 270 top
R143  0  [0603]  235.2,108.9 270 top
R144  0  [0603]  227.03,109.03 270 top
U1  MIC5205 3V3  [SOT23-5]  19.05,33.85 90 top
U2  MIC5205 3V3  [SOT23-5]  40.16,33.85 270 top
U3  PIC24FJ64GA002  [SSOP28]  40.23,22.52 270 top
U4  MIC5205 5V0  [SOT23-5]  30.7,33.85 270 top
U5  FT232RL-BASICSSOP  [SSOP28DB]  27.66,22.52 90 top
U6  4066  [TSSOP14]  53.82,12.49 270 top
U7  4066  [TSSOP14]  117.32,12.49 270 top
U8  PIC24FJ64GA002  [SSOP28]  103.73,22.52 270 top
U9  MIC5205 3V3  [SOT23-5]  82.55,33.85 90 top
U10  MIC5205 3V3  [SOT23-5]  103.66,33.85 270 top
U11  MIC5205 5V0  [SOT23-5]  94.2,33.85 270 top
U12  FT232RL-BASICSSOP  [SSOP28DB]  91.16,22.52 90 top
U13  4066  [TSSOP14]  180.82,12.49 270 top
U14  PIC24FJ64GA002  [SSOP28]  167.23,22.52 270 top
U15  MIC5205 3V3  [SOT23-5]  146.05,33.85 90 top
U16  MIC5205 3V3  [SOT23-5]  167.16,33.85 270 top
U17  MIC5205 5V0  [SOT23-5]  157.7,33.85 270 top
U18  FT232RL-BASICSSOP  [SSOP28DB]  154.66,22.52 90 top
U19  4066  [TSSOP14]  244.32,12.49 270 top
U20  PIC24FJ64GA002  [SSOP28]  230.73,22.52 270 top
U21  MIC5205 3V3  [SOT23-5]  209.55,33.85 90 top
U22  MIC5205 3V3  [SOT23-5]  230.66,33.85 270 top
U23  MIC5205 5V0  [SOT23-5]  221.2,33.85 270 top
U24  FT232RL-BASICSSOP  [SSOP28DB]  218.16,22.52 90 top
U25  4066  [TSSOP14]  53.82,50 270 top
U26  PIC24FJ64GA002  [SSOP28]  40.23,60.03 270 top
U27  MIC5205 3V3  [SOT23-5]  19.05,71.35 90 top
U28  MIC5205 3V3  [SOT23-5]  40.16,71.35 270 top
U29  MIC5205 5V0  [SOT23-5]  30.7,71.35 270 top
U30  FT232RL-BASICSSOP  [SSOP28DB]  27.66,60.03 90 top
U31  4066  [TSSOP14]  117.32,50 270 top
U32  PIC24FJ64GA002  [SSOP28]  103.73,60.03 270 top
U33  MIC5205 3V3  [SOT23-5]  82.55,71.35 90 top
U34  MIC5205 3V3  [SOT23-5]  103.66,71.35 270 top
U35  MIC5205 5V0  [SOT23-5]  94.2,71.35 270 top
U36  FT232RL-BASICSSOP  [SSOP28DB]  91.16,60.03 90 top
U37  4066  [TSSOP14]  180.82,50 270 top
U38  PIC24FJ64GA002  [SSOP28]  167.23,60.03 270 top
U39  MIC5205 3V3  [SOT23-5]  146.05,71.35 90 top
U40  MIC5205 3V3  [SOT23-5]  167.16,71.35 270 top
U41  MIC5205 5V0  [SOT23-5]  157.7,71.35 270 top
U42  FT232RL-BASICSSOP  [SSOP28DB]  154.66,60.03 90 top
U43  4066  [TSSOP14]  244.32,50 270 top
U44  PIC24FJ64GA002  [SSOP28]  230.73,60.03 270 top
U45  MIC5205 3V3  [SOT23-5]  209.55,71.35 90 top
U46  MIC5205 3V3  [SOT23-5]  230.66,71.35 270 top
U47  MIC5205 5V0  [SOT23-5]  221.2,71.35 270 top
U48  FT232RL-BASICSSOP  [SSOP28DB]  218.16,60.03 90 top
U49  4066  [TSSOP14]  53.82,87.5 270 top
U50  PIC24FJ64GA002  [SSOP28]  40.23,97.54 270 top
U51  MIC5205 3V3  [SOT23-5]  19.05,108.86 90 top
U52  MIC5205 3V3  [SOT23-5]  40.16,108.86 270 top
U53  MIC5205 5V0  [SOT23-5]  30.7,108.86 270 top
U54  FT232RL-BASICSSOP  [SSOP28DB]  27.66,97.54 90 top
U55  4066  [TSSOP14]  117.32,87.5 270 top
U56  PIC24FJ64GA002  [SSOP28]  103.73,97.54 270 top
U57  MIC5205 3V3  [SOT23-5]  82.55,108.86 90 top
U58  MIC5205 3V3  [SOT23-5]  103.66,108.86 270 top
U59  MIC5205 5V0  [SOT23-5]  94.2,108.86 270 top
U60  FT232RL-BASICSSOP  [SSOP28DB]  91.16,97.54 90 top
U61  4066  [TSSOP14]  180.82,87.5 270 top
U62  PIC24FJ64GA002  [SSOP28]  167.23,97.54 270 top
U63  MIC5205 3V3  [SOT23-5]  146.05,108.86 90 top
U64  MIC5205 3V3  [SOT23-5]  167.16,108.86 270 top
U65  MIC5205 5V0  [SOT23-5]  157.7,108.86 270 top
U66  FT232RL-BASICSSOP  [SSOP28DB]  154.66,97.54 90 top
U67  4066  [TSSOP14]  244.32,87.5 270 top
U68  PIC24FJ64GA002  [SSOP28]  230.73,97.54 270 top
U69  MIC5205 3V3  [SOT23-5]  209.55,108.86 90 top
U70  MIC5205 3V3  [SOT23-5]  230.66,108.86 270 top
U71  MIC5205 5V0  [SOT23-5]  221.2,108.86 270 top
U72  FT232RL-BASICSSOP  [SSOP28DB]  218.16,97.54 90 top
U$1  [DP-LOGO]  23.5,9.4 0 top
U$2  [DP-LOGO]  87,9.4 0 top
U$3  [DP_LOGO_ART_1X1]  52.65,15.1 0 bottom
U$4  [DP_LOGO_ART_1X1]  116.15,15.1 0 bottom
U$5  [DP-LOGO]  150.5,9.4 0 top
U$6  [DP_LOGO_ART_1X1]  179.65,15.1 0 bottom
U$7  [DP-LOGO]  214,9.4 0 top
U$8  [DP_LOGO_ART_1X1]  243.15,15.1 0 bottom
U$9  [DP-LOGO]  23.5,46.91 0 top
U$10  [DP_LOGO_ART_1X1]  52.65,52.6 0 bottom
U$11  [DP-LOGO]  87,46.91 0 top
U$12  [DP_LOGO_ART_1X1]  116.15,52.6 0 bottom
U$13  [DP-LOGO]  150.5,46.91 0 top
U$14  [DP_LOGO_ART_1X1]  179.65,52.6 0 bottom
U$15  [DP-LOGO]  214,46.91 0 top
U$16  [DP_LOGO_ART_1X1]  243.15,52.6 0 bottom
U$17  [DP-LOGO]  23.5,84.41 0 top
U$18  [DP_LOGO_ART_1X1]  52.65,90.11 0 bottom
U$19  [DP-LOGO]  87,84.41 0 top
U$20  [DP_LOGO_ART_1X1]  116.15,90.11 0 bottom
U$21  [DP-LOGO]  150.5,84.41 0 top
U$22  [DP_LOGO_ART_1X1]  179.65,90.11 0 bottom
U$23  [DP-LOGO]  214,84.41 0 top
U$24  [DP_LOGO_ART_1X1]  243.15,90.11 0 bottom

## Library data of the parts
C1 C2 C5 C6 C10-C16 C21 C23-C27 C32 C34-C38 C43 C45-C49 C54 C56-C60 C65 C67-C71 C76 C78-C82 C87 C89-C93 C98 C100-C104 C109 C111-C115 C120 C122-C126 C131 = SparkFun-Capacitors; PROD_ID: CAP-00810
C3 C4 C7-C9 C17-C20 C22 C28-C31 C33 C39-C42 C44 C50-C53 C55 C61-C64 C66 C72-C75 C77 C83-C86 C88 C94-C97 C99 C105-C108 C110 C116-C119 C121 C127-C130 C132 = SparkFun-Capacitors; PROD_ID: CAP-11330
E$1 = SparkFun-Retired
E$7 E$8 FID1-FID24 LOGO1-LOGO24 = SparkFun-Aesthetics
J1-J12 = SparkFun-Connectors; PROD_ID: CONN-08193
JP1 JP4 JP6 JP8 JP10 JP12 JP14 JP16 JP18 JP20 JP22 JP24 = SparkFun-Connectors; PROD_ID: CONN-09508
JP2 JP3 JP5 JP7 JP9 JP11 JP13 JP15 JP17 JP19 JP21 JP23 = SparkFun-Connectors
L1-L12 = SparkFun-Passives; PROD_ID: NDUC-12579
LED1-LED96 = SparkFun-LED; PROD_ID: DIO-00819
PCB1-PCB12 = SparkFun-Boards
R1 R5 R8 R22-R24 R34-R36 R46-R48 R58-R60 R70-R72 R82-R84 R94-R96 R106-R108 R118-R120 R130-R132 R142-R144 = SparkFun-Resistors; PROD_ID: RES-08787
R2 R3 R12 R19-R21 R31-R33 R43-R45 R55-R57 R67-R69 R79-R81 R91-R93 R103-R105 R115-R117 R127-R129 R139-R141 = Testing; PROD_ID: RES-13167
R4 R6 R7 R9 R14 R16-R18 R26 R28-R30 R38 R40-R42 R50 R52-R54 R62 R64-R66 R74 R76-R78 R86 R88-R90 R98 R100-R102 R110 R112-R114 R122 R124-R126 R134 R136-R138 = SparkFun-Resistors; PROD_ID: RES-07856
R10 R11 R13 R15 R25 R27 R37 R39 R49 R51 R61 R63 R73 R75 R85 R87 R97 R99 R109 R111 R121 R123 R133 R135 = SparkFun-Resistors; PROD_ID: RES-08296
U1 U2 U9 U10 U15 U16 U21 U22 U27 U28 U33 U34 U39 U40 U45 U46 U51 U52 U57 U58 U63 U64 U69 U70 = SparkFun-PowerIC; PROD_ID: VREG-00822
U3 U8 U14 U20 U26 U32 U38 U44 U50 U56 U62 U68 = Testing; PROD_ID: IC-09426
U4 U11 U17 U23 U29 U35 U41 U47 U53 U59 U65 U71 = SparkFun-PowerIC; PROD_ID: VREG-00823
U5 U12 U18 U24 U30 U36 U42 U48 U54 U60 U66 U72 = SparkFun-DigitalIC; PROD_ID: IC-00870
U6 U7 U13 U19 U25 U31 U37 U43 U49 U55 U61 U67 = 40xx; PROD_ID: IC-13191
U$1 U$2 U$5 U$7 U$9 U$11 U$13 U$15 U$17 U$19 U$21 U$23 = DP-logo
U$3 U$4 U$6 U$8 U$10 U$12 U$14 U$16 U$18 U$20 U$22 U$24 = dp_devices